# Altium PCB JlinkV9mini.PcbDoc
Units mm, origin at the board's own origin, x right, y up, seen from the top; angles counter-clockwise.
Board outline 43.05 x 18 mm, 2 copper layers (Top Layer, Bottom Layer); 47 components, 41 nets, 192 pads, 56 vias.
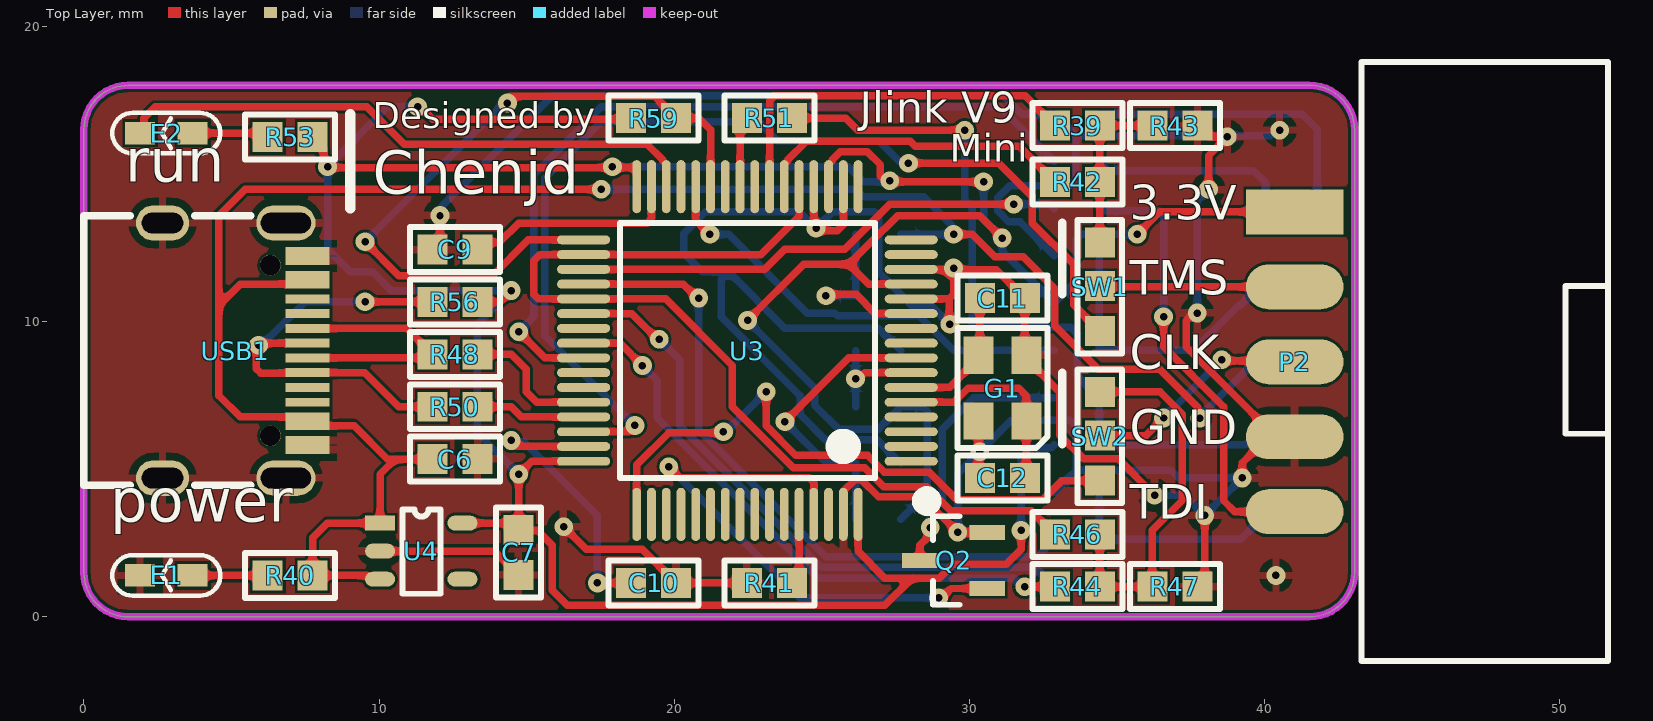
[diagram p0: Top Layer view]
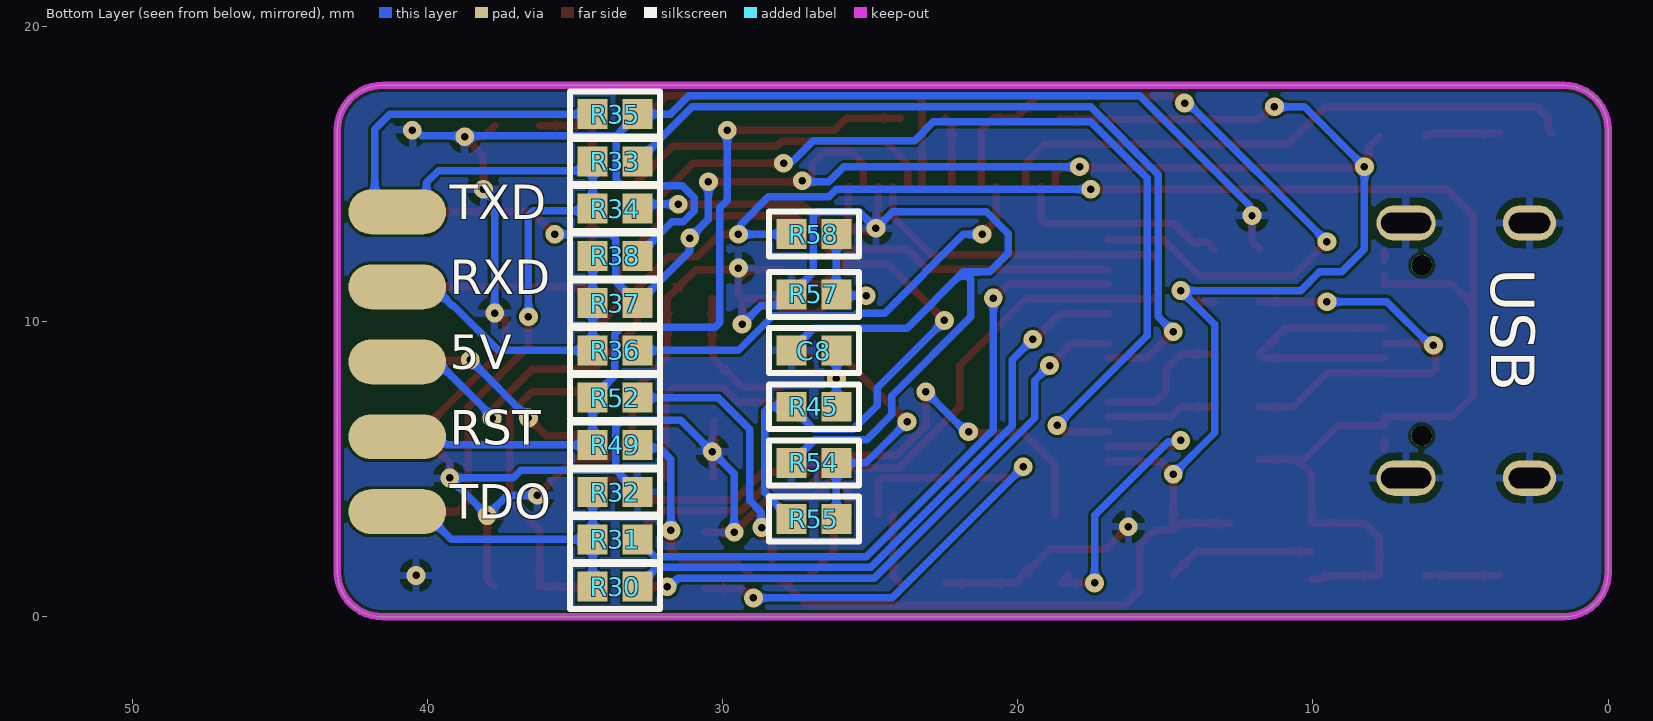
[diagram p1: Bottom Layer view, seen from below]
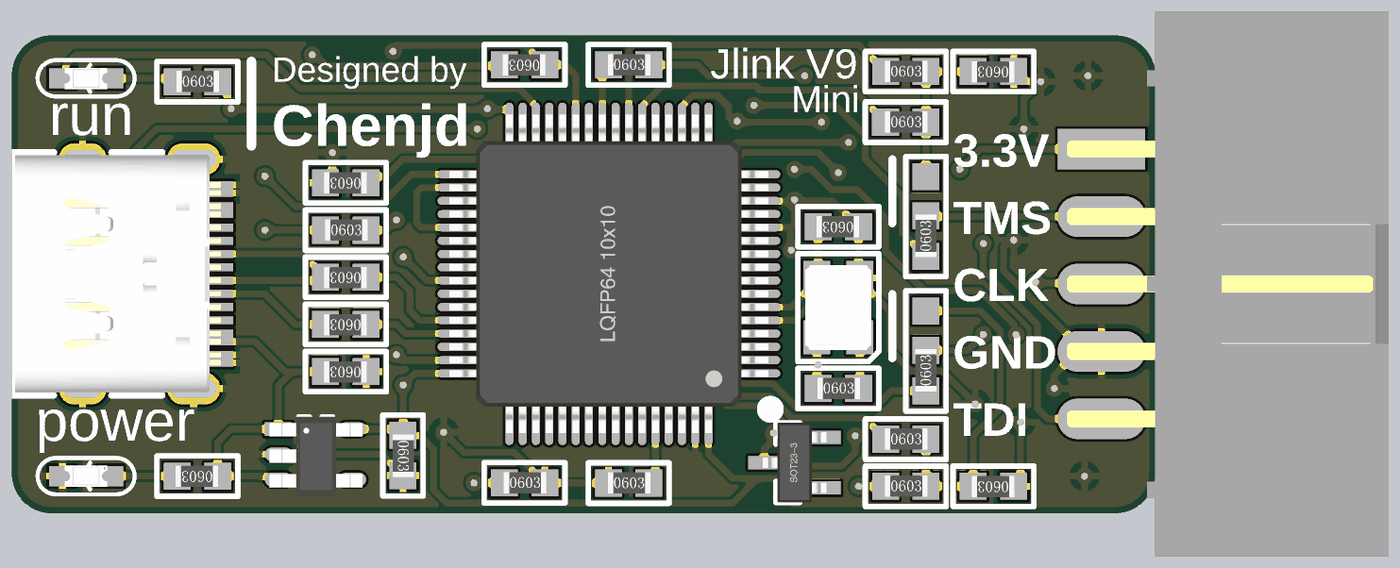
[diagram p2: 3D render of the assembled board from above, using the file's embedded part models]
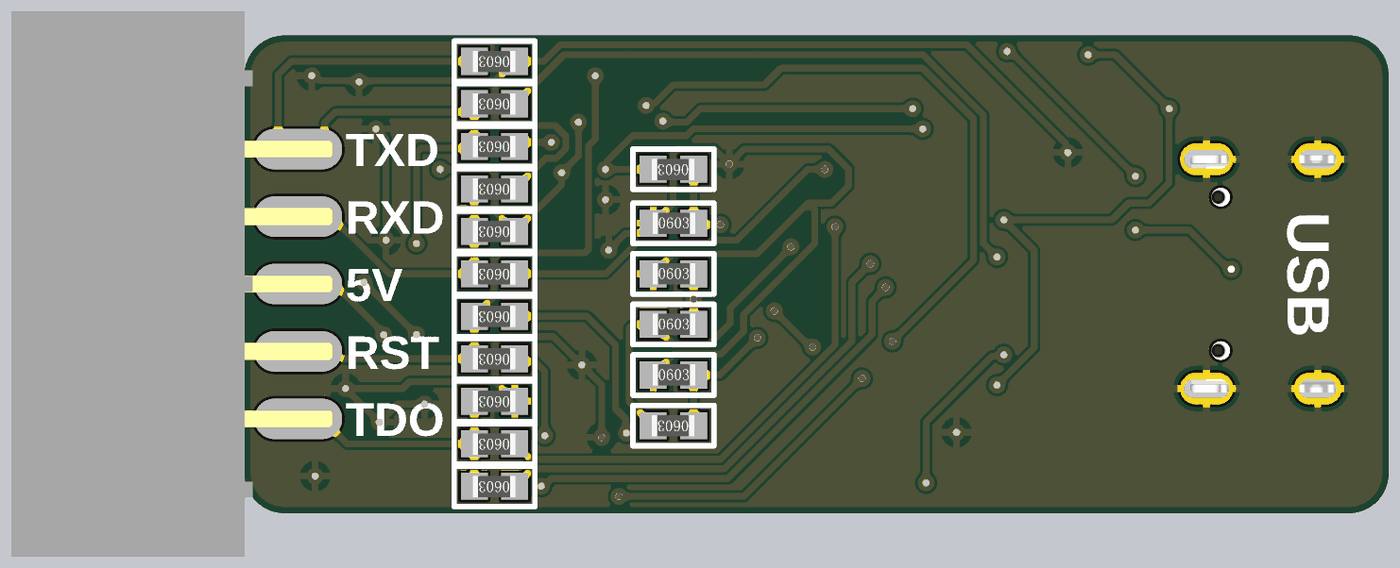
[diagram p3: 3D render of the assembled board from below, using the file's embedded part models]

## Layer stack, top to bottom
Top Solder: solder mask 0.0102, Solder Resist, Dk 3.5
Top Layer: signal copper 0.0356
Dielectric 1: dielectric 0.32, FR-4, Dk 4.8
Bottom Layer: signal copper 0.0356
Bottom Solder: solder mask 0.0102, Solder Resist, Dk 3.5

## Board outline
0,1.5 ccw(c1.5,1.5) 1.5,0 41.5,0 ccw(c41.526,1.526) 43.053,1.5 43.053,16.5 ccw(c41.527,16.474) 41.5,18 1.5,18 ccw(c1.5,16.5) 0,16.5

## Design rules (kind name [scope] priority, off if disabled: settings)
Clearance [All] p1: gap=0.1 ignorepadtopadclearanceinfootprint=FALSE
PolygonConnect [All] p1: connectstyle=Relief reliefconductorwidth=0.254 reliefentries=4 polygonreliefangle="90 Angle" airgapwidth=0.254
RoutingVias [All] p1: holewidth=0.711 width=1.27 viastyle="Through Hole" minholewidth=0.711 minwidth=1.27 maxholewidth=0.711 maxwidth=1.27
SolderMaskExpansion [All] p1: expansion=0.102 istentingtop=FALSE
Width [All] p1: maxlimit=0.254 minlimit=0.254 preferedwidth=0.254
30 further rules are at their usual default settings.

## Components (designator, comment, footprint, x,y, rotation, side; value= is the part's Value field where it differs from the comment)
C6 "10uF" 0603 13.318,5.328 r180 top
C7 "10uF" 0603 14.732,2.921 r270 top
C8 "104" 0603 27.651,9.023 r180 bottom
C9 "2.2uf" 0603 13.318,12.44 r180 top
C10 "2.2uf" 0603 18.559,1.149 r0 top
C11 "18pF" 0603 31.86,10.789 r180 top
C12 "18pF" 0603 30.37,4.705 r0 top
E1 "LED" LED_0603L 3.937,1.397 r180 top
E2 "LED" LED_0603L 3.937,16.383 r180 top
G1 "12MHz(无源贴片)" G3225 31.115,7.747 r90 top
P2 "Header 5X2" "300S-2*5P 2.54MM_2" 41.021,13.716 r0 top
Q2 "SS8050" SOT23-3N 29.464,1.905 r90 top
R30 "10K" 0603 32.893,1.01 r0 bottom
R31 "10K" 0603 32.893,2.611 r0 bottom
R32 "10K" 0603 32.893,4.212 r0 bottom
R33 "101" 0603 32.893,15.417 r0 bottom
R34 "101" 0603 32.893,13.816 r0 bottom
R35 "10K" 0603 32.893,17.018 r0 bottom
R36 "101" 0603 32.893,9.014 r0 bottom
R37 "10K" 0603 32.893,10.615 r0 bottom
R38 "10K" 0603 32.893,12.216 r0 bottom
R39 "101" 0603 32.91,16.643 r0 top
R40 "1K" 0603 7.73,1.391 r180 top
R41 "10K" 0603 22.479,1.143 r0 top
R42 "101" 0603 32.91,14.738 r0 top
R43 "10K" 0603 37.702,16.631 r180 top
R44 "101" 0603 32.91,1.022 r0 top
R45 "120" 0603 27.651,7.118 r180 bottom
R46 "101" 0603 32.91,2.794 r0 top
R47 "10K" 0603 37.702,1.01 r180 top
R48 "22R" 0603 13.318,8.884 r180 top
R49 "10K" 0603 32.893,5.812 r0 bottom
R50 "22R" 0603 13.318,7.106 r180 top
R51 "101" 0603 22.479,16.897 r0 top
R52 "101" 0603 32.893,7.413 r0 bottom
R53 "120" 0603 6.24,16.262 r0 top
R54 "10K" 0603 27.651,5.213 r180 bottom
R55 "10K" 0603 26.162,3.296 r0 bottom
R56 "1.5K" 0603 11.828,10.668 r0 top
R57 "10K" 0603 27.651,10.928 r180 bottom
R58 "10K" 0603 26.162,12.954 r0 bottom
R59 "10K" 0603 20.049,16.885 r180 top
SW1 "SW-oneoftwo" SW-oneoftwo-0603 34.411,11.176 r90 top
SW2 "SW-oneoftwo" SW-oneoftwo-0603 34.411,6.113 r90 top
U3 "STM32F205RET6" "LQFP64 10x10_N" 22.479,9.017 r90 top
U4 "SPX3819" SOT-23-5 10.033,3.17 r0 top
USB1 "KH-TYPE-C-16P" USB-C-16P 5.08,9.017 r270 top

## Footprints (in the part's own frame and the unit in brackets; to place one, negate y for a bottom-side part, rotate by r counter-clockwise, add the part's x,y. Pads: shape width x height; smd on the part's side, far side on the other; paste and mask are expansions set on the pad)
"300S-2*5P 2.54MM_2" [mil] "2.54mm 2*5P 直 简牛"
  rect 130x60 smd: 1(0,0)
  oval 130x60 smd far side: 2(0,0) 4(0,-100) 6(0,-200) 8(0,-300) 10(0,-400)
  oval 130x60 smd: 3(0,-100) 5(0,-200) 7(0,-300) 9(0,-400)
  silkscreen extent 89,-599 418,200, body extent -50,-604 426,204, height 169
0603 [mil] "0603封装"
  rect 40x40 smd: 1(-0.68,-0.23) 2(59.32,-0.23)
  silkscreen extent -31,-30 89,30, body extent -1,-16 62,16, height 18
G3225 [mil] "3225贴片晶振"
  rect 50x40 smd: 1(-44,-32) 2(44,-32) 3(44,32) 4(-44,32)
  silkscreen extent -80,-60 80,60, body extent -63,-49 63,49, height 32
LED_0603L [mil] "LED"
  rect 40x30 smd: 1(10,0) 2(80,0)
  silkscreen extent -27,-27 117,27, body extent 14,-16 77,16, height 24
"LQFP64 10x10_N" [mm] "64脚，体宽10x10mm，脚距0.5mm"
  oval 0.3x1.8 smd: 1(-3.75,-5.55) 2(-3.25,-5.55) 3(-2.75,-5.55) 4(-2.25,-5.55) 5(-1.75,-5.55) 6(-1.25,-5.55) 7(-0.75,-5.55) 8(-0.25,-5.55) 9(0.25,-5.55) 10(0.75,-5.55) 11(1.25,-5.55) 12(1.75,-5.55) 13(2.25,-5.55) 14(2.75,-5.55) 15(3.25,-5.55) 16(3.75,-5.55) 33(3.75,5.55) 34(3.25,5.55) 35(2.75,5.55) 36(2.25,5.55) 37(1.75,5.55) 38(1.25,5.55) 39(0.75,5.55) 40(0.25,5.55) 41(-0.25,5.55) 42(-0.75,5.55) 43(-1.25,5.55) 44(-1.75,5.55) 45(-2.25,5.55) 46(-2.75,5.55) 47(-3.25,5.55) 48(-3.75,5.55)
  oval 1.8x0.3 smd: 17(5.55,-3.75) 18(5.55,-3.25) 19(5.55,-2.75) 20(5.55,-2.25) 21(5.55,-1.75) 22(5.55,-1.25) 23(5.55,-0.75) 24(5.55,-0.25) 25(5.55,0.25) 26(5.55,0.75) 27(5.55,1.25) 28(5.55,1.75) 29(5.55,2.25) 30(5.55,2.75) 31(5.55,3.25) 32(5.55,3.75) 49(-5.55,3.75) 50(-5.55,3.25) 51(-5.55,2.75) 52(-5.55,2.25) 53(-5.55,1.75) 54(-5.55,1.25) 55(-5.55,0.75) 56(-5.55,0.25) 57(-5.55,-0.25) 58(-5.55,-0.75) 59(-5.55,-1.25) 60(-5.55,-1.75) 61(-5.55,-2.25) 62(-5.55,-2.75) 63(-5.55,-3.25) 64(-5.55,-3.75)
  silkscreen extent -5.35,-6.33 4.32,4.32, body extent -6,-6 6,6, height 1.45
SOT23-3N [mm] "3x1.3x1mm(长宽高)"
  rect 0.5x1.2 smd: 1(-0.95,-1.143) 2(0.95,-1.143) 3(0,1.143)
  silkscreen extent -1.5,-0.2 1.5,0.7, body extent -1.5,-1.2 1.5,1.2, height 1.05
SOT-23-5 [mil] "SPX3819"
  rect 40x20 smd: 1(0,0)
  oval 40x20 smd: 2(0,-37.4) 3(0,-74.8) 4(110,-74.8) 5(110,0)
  silkscreen extent 30,-94 81,18, body extent -13,-100 125,18, height 43
SW-oneoftwo-0603 [mil] "二选一电阻开关0603"
  rect 40x40 smd: 1(0.81,-0.24) 2(59.32,-0.23) 3(-59.19,-0.24)
  silkscreen extent -89,-30 89,30, body extent -60,-16 3,16, height 18
USB-C-16P [mm] "USB Type-c 16P"
  oval 1.2x2 hole 0.7 slot 1.7 at 90 deg: 1(-4.32,1.765) 2(4.32,1.765)
  oval 1.2x1.8 hole 0.7 slot 1.4 at 90 deg: 3(-4.32,-2.415) 4(4.32,-2.415)
  rect 0.3x1.5 smd: A1(-3.35,2.5) A4(-2.55,2.5) A5(-1.25,2.5) A6(-0.25,2.5) A7(0.25,2.5) A8(1.25,2.5) A9(2.55,2.5) A12(3.35,2.5) B1(3.05,2.5) B4(2.25,2.5) B5(1.75,2.5) B6(0.75,2.5) B7(-0.75,2.5) B8(-1.75,2.5) B9(-2.25,2.5) B12(-3.05,2.5)
  round 0.7 hole 0.7 unplated: ""(-2.89,1.235) ""(2.89,1.235)
  silkscreen extent -4.57,-5.08 4.57,0.57, body extent -4.48,-4.96 4.48,2.79, height 3.26

## Part data
C6 C7 C8 C9 C10: library part "CAP Nonpolarity", "无极电容"
C11 C12: library part CAP, "无极电容"
E1 E2: "LED灯"
G1: library part MM-11B, "无源晶振MCU使用"
P2: "Header, 5-Pin, Dual row", LatestRevisionDate=17-Jul-2002, LatestRevisionNote="Re-released for DXP Platform.", Publisher="Altium Limited"
Q2: library part 8050-SMD, "高频放大-NPN型", BOM名称=高频放大-NPN型, 学习资源=www.ooocke.com, 属性="40V 1.5A 1W 100MHZ", 版权归属=源创客
R30 R31 R32 R33 R34 R35 R36 R37 R38 R39 R40 R41 R42 R43 R44 R45 R46 R47 R48 R49 R50 R51 R52 R53 R54 R55 R56 R57 R58 R59: library part R, "电阻"
SW1 SW2: "二选一电阻开关"
U3: "Microcontroller   ST", Brand=ST, Code=104261, InitialReleaseDate=25-Mar-2015, LatestRevisionDate=25-Mar-2015, PackageReference=SQFP10x10-64, Vision=V5.0
U4: "稳压器"
USB1: library part "USB-TYPE-C 16P", BOM_Manufacturer="Shenzhen Kinghelm Elec", BOM_Manufacturer Part=KH-TYPE-C-16P, BOM_Supplier=LCSC, BOM_Supplier Part=C709357, Contributor=LCSC, spicePre=U, spiceSymbolName=KH-TYPE-C-16P

## Via types
v1: diameter 0.635, hole 0.254, Top Layer to Bottom Layer, tented both sides, 56 vias

## Nets (pads, with @x,y where several pads share a name; then routed paths per layer and width w, separated by ;. In a path a pad name is that pad's centre, name@x,y a point inside that pad or via, vN(x,y) a via of type N, cw(c..) or ccw(c..) an arc to the next point about the centre after c; other vN are vias at no path point)
3V3: C7.1 P2.1 R37.1 R45.1 R49.1 R53.2 R55.2 R56.2 R59.2 U3.13 U3.19 U3.32 U3.48 U3.64 U4.5 | length 132.7
  Top Layer w0.254: R53.2 8.128,15.875 8.128,15.47 8.255,15.343 v1(8.255,15.24) 8.28,15.215 17.907,15.215 18.708,15.215 18.729,15.194 U3.32 ; v1(11.303,17.272) 11.406,17.272 11.824,16.855 18.506,16.855 R59.2 ; U4.5 14.494,3.17 C7.1 ; R56.2 14.091,10.662 v1(14.478,11.049) ; U3.48 15.173,5.267 v1(14.732,4.826) 14.732,2.944 C7.1 ; v1(22.483,10.037) 24.384,11.938 25.917,11.938 ; U3.19 25.229,15.329 25.352,15.452 25.352,15.473 25.627,15.748 26.543,15.748 26.987,15.303 26.987,14.922 27.142,14.768 v1(27.305,14.768) ; U3.64 26.229,2.219 27.139,1.309 28.057,1.309 ; v1@27.305,14.732 v1(30.48,14.732) ; U3.13 26.588,11.267 25.917,11.938 ; v1(31.115,12.827) 30.353,13.589 27.568,13.589 26.642,12.664 25.917,11.938 ; v1(31.75,2.921) 31.75,2.286 31.242,1.778 29.445,1.778 28.975,1.309 28.057,1.309 ; v1(35.687,12.954) 36.449,13.716 P2.1 ; C7.1 14.743,2.921 15.367,2.921 15.875,2.413 15.875,0.889 16.383,0.381 27.129,0.381 28.057,1.309
  Bottom Layer w0.254: v1(11.303,17.272) 10.287,17.272 v1(8.255,15.24) 8.255,12.446 9.017,11.684 9.779,11.684 10.414,11.049 v1(14.478,11.049) 13.335,9.906 13.335,6.223 v1(14.732,4.826) ; v1(17.907,15.24) 25.889,15.24 26.397,14.732 27.269,14.732 v1(27.305,14.768) ; v1(22.483,10.037) 22.483,10.029 24.765,7.747 24.765,7.155 25.57,6.35 26.907,6.35 R45.1 28.426,7.112 28.575,6.963 28.575,4.208 R55.2 ; v1(30.48,14.732) 30.48,13.462 v1(31.115,12.827) 31.115,12.381 R37.1 33.616,11.361 33.616,12.788 33.785,12.957 35.684,12.957 v1(35.687,12.954) ; v1(31.75,2.921) 31.75,5.334 32.131,5.715 32.772,5.715 R49.1
+5: C6.2 P2.6 R40.1 R58.2 U4.1 U4.3 USB1.A4 USB1.A9 USB1.B4 USB1.B9 | length 70.2
  Top Layer w0.254: USB1.A4 USB1.B9 5.298,11.267 4.572,10.541 ; U4.3 9.71,1.27 9.583,1.397 R40.1 7.747,2.667 8.25,3.17 U4.1 10.033,4.826 10.541,5.334 ; C6.2 10.541,5.334 ; v1(17.526,14.478) 5.461,14.478 4.572,13.589 4.572,10.541 ; v1(29.464,12.954) 30.099,12.954 30.861,12.192 31.817,12.192 32.893,11.116 32.893,9.86 34.371,8.382 36.449,8.382 37.737,7.094 37.737,6.797 v1(37.81,6.724) ; 4.572,10.541 4.572,7.493 5.298,6.767 USB1.B4 USB1.A9 9.154,6.467 10.287,5.334 10.541,5.334
  Bottom Layer w0.254: v1(17.526,14.478) 26.151,14.478 26.405,14.224 28.448,14.224 29.391,13.281 29.391,13.027 v1(29.464,12.954) R58.2@27.675,12.954 ; v1(37.81,6.724) 37.81,6.781 39.665,8.636 P2.6
CLK: SW2.3 U3.49 | length 20.8
  Top Layer w0.254: U3.49 18.729,5.14 19.812,6.223 21.626,6.223 v1(21.668,6.265) ; v1(23.114,7.62) 23.114,6.469 24.122,5.461 26.552,5.461 27.123,4.89 28.638,4.89 29.564,3.964 32.479,3.964 33.125,4.61 SW2.3
  Bottom Layer w0.254: v1(21.668,6.265) 21.759,6.265 v1(23.114,7.62)
D+: R50.1 U3.45 | length 3.7
  Top Layer w0.254: R50.1 14.478,7.112 14.823,6.767 U3.45
D-: R48.1 U3.44 | length 4.7
  Top Layer w0.254: R48.1 14.478,8.89 14.986,8.382 14.986,7.62 15.339,7.267 U3.44
DIO: SW1.3 U3.46 | length 35.3
  Top Layer w0.254: U3.46 18.459,6.267 v1(18.669,6.477) ; v1(27.936,15.363) 27.94,15.367 30.988,15.367 32.131,14.224 32.131,13.335 33.528,11.938 33.528,10.562 SW1.3
  Bottom Layer w0.254: v1(18.669,6.477) 15.621,9.525 15.621,14.859 17.526,16.764 22.86,16.764 23.495,16.129 26.924,16.129 27.617,15.436 27.863,15.436 v1(27.936,15.363)
GND: C6.1 C7.2 C8.1 C9.2 C10.2 C11.1 C12.1 E1.2 G1.2 G1.4 P2.7 Q2.2 R32.1 R35.1 R38.1 R41.1 R43.1 R47.1 R54.1 R57.1 U3.12 U3.14 U3.18 U3.20 U3.63 U4.2 USB1.1 USB1.2 USB1.3 USB1.4 USB1.A1 USB1.A12 USB1.B1 USB1.B12 | length 150.6
  Top Layer w0.254: USB1.A12 USB1.B1 ; USB1.B12 USB1.A1 ; U4.2 13.92,2.22 C7.2 ; C9.2 12.065,12.7 v1(12.065,13.589) ; v1(16.256,3.048) 17.018,2.286 18.923,2.286 C10.2 22.456,1.143 R41.1 ; U3.20 24.729,13.23 24.878,13.081 25.527,13.081 25.781,13.335 25.738,13.378 25.738,14.558 U3.18 ; U3.63 25.738,3.476 25.738,4.259 26.124,4.645 26.334,4.645 26.924,4.055 28.409,4.055 v1(29.608,2.856) 29.609,2.855 Q2.2 ; U3.12 29.309,10.767 ; U3.14 28.038,11.758 29.136,11.758 ; v1@29.337,9.906 v1(29.341,9.91) 29.309,9.942 29.309,10.767 ; G1.4 30.302,4.75 C12.1 ; v1(36.271,4.114) 35.04,5.345 33.869,5.345 33.062,6.152 33.062,7.603 31.928,8.738 G1.2 31.877,8.915 C11.1 30.914,11.758 29.136,11.758 ; R47.1 37.973,1.27 v1(37.973,3.429) ; v1@37.719,10.414 37.338,10.033 37.338,9.144 P2.7@40.386,6.096 ; R43.1 38.1,16.256 v1(38.735,16.256) 38.1,15.621 v1(38.1,14.478) ; v1(39.243,4.699) 39.243,5.207 40.132,6.096 P2.7@40.386,6.096 ; P2.7 P2.7@40.386,6.096 ; 29.136,11.758 29.464,11.43 29.464,10.922 29.309,10.767
  Bottom Layer w0.254: v1(12.065,13.589) 12.138,13.662 12.138,13.916 15.868,17.646 31.153,17.646 31.775,17.024 R35.1 33.611,16.289 ; R54.1 26.88,5.996 25.119,5.996 24.261,6.854 24.261,7.489 21.59,10.16 21.59,11.43 21.844,11.684 ; C8.1 26.907,9.779 23.749,9.779 21.844,11.684 ; v1(29.341,9.91) 29.333,9.91 28.702,10.541 28.05,10.541 R57.1 26.924,11.667 26.924,13.567 26.775,13.716 25.364,13.716 v1(24.803,13.155) 24.243,13.716 21.06,13.716 20.32,12.976 20.32,12.319 20.955,11.684 21.844,11.684 ; v1(29.608,2.856) 29.608,4.843 v1(30.353,5.588) 31.42,6.655 33.412,6.655 33.611,6.455 33.611,4.953 ; R32.1 33.611,4.953 ; R38.1 31.726,13.371 31.333,13.371 30.956,13.748 30.956,14.2 31.361,14.605 33.395,14.605 33.611,14.821 33.611,16.289 ; v1(36.271,4.114) 37.288,4.114 v1(37.973,3.429) v1(39.243,4.699) 37.096,4.699 36.842,4.953 33.611,4.953 ; v1(37.719,10.287) 37.719,14.097 v1(38.1,14.478) ; v1(40.513,16.479) 40.379,16.479 40.189,16.289 38.735,16.289 33.611,16.289
  other v1: 40.386,1.397 29.464,11.811
LED: E2.2 U3.30 | length 20
  Top Layer w0.254: E2.2 2.032,16.51 2.032,16.891 2.413,17.272 9.588,17.272 10.858,16.002 19.077,16.002 19.606,15.473 19.606,15.452 19.729,15.329 U3.30
NetC8_2: C8.2 R45.2 U3.7 | length 3.9
  Top Layer w0.254: v1(26.145,8.064) 26.248,8.064 26.45,8.267 U3.7
  Bottom Layer w0.254: R45.2 v1(26.145,8.064) C8.2
NetC9_1: C9.1 U3.31 | length 7.4
  Top Layer w0.254: C9.1 13.567,12.678 14.075,12.678 14.732,13.335 19.08,13.335 19.229,13.484 U3.31
NetC10_1: C10.1 U3.47 | length 10.3
  Top Layer w0.254: v1(14.478,5.969) 14.68,5.767 U3.47 U3.47@16.938,5.758 ; v1(17.399,1.143) C10.1 C10.1@18.288,1.397
  Bottom Layer w0.254: v1(14.478,5.969) 14.527,5.92 14.908,5.92 17.399,3.429 v1(17.399,1.143)
NetE1_1: E1.1 R40.2 | length 2.5
  Top Layer w0.254: E1.1 R40.2
NetE2_1: E2.1 R53.1 | length 2.6
  Top Layer w0.254: E2.1 6.096,16.383 R53.1
NetP2_3: P2.3 SW1.1 | length 6.6
  Top Layer w0.254: SW1.1 34.438,11.176 P2.3
NetP2_5: P2.5 SW2.1 | length 7.7
  Top Layer w0.254: SW2.1 35.979,6.134 v1(36.576,6.731) ; v1(38.549,8.704) 38.582,8.67 40.987,8.67 P2.5
  Bottom Layer w0.254: v1(36.576,6.731) v1(38.549,8.704)
NetQ2_3: Q2.3 R52.1 | length 9
  Top Layer w0.254: Q2.3 28.321,2.413 28.696,2.788 28.696,2.998 v1(28.674,3.02)
  Bottom Layer w0.254: v1(28.674,3.02) 28.702,3.048 28.702,3.556 29.083,3.937 29.083,6.35 30.152,7.419 R52.1
NetR41_2: R41.2 U3.60 | length 2.4
  Top Layer w0.254: R41.2 24.229,1.38 U3.60
OSCIN: C12.2 G1.1 U3.5 | length 7
  Top Layer w0.254: U3.5 29.476,7.267 29.956,7.747 31.671,7.747 31.928,7.489 G1.1 ; C12.2 31.928,4.75 G1.1
OSCOUT: C11.2 G1.3 U3.6 | length 4.8
  Top Layer w0.254: U3.6 29.332,7.767 30.302,8.738 G1.3 30.353,8.915 C11.2
PA5: R46.1 U3.21 U3.34 U3.37 | length 33.6
  Top Layer w0.254: U3.21 24.229,13.561 22.935,12.267 U3.34 15.442,12.267 15.24,12.065 15.24,10.922 15.395,10.767 U3.37 19.713,10.767 21.971,8.509 21.971,7.111 24.029,5.053 26.459,5.053 27.103,4.409 28.556,4.409 29.373,3.592 32.089,3.592 R46.1
PA6: R42.1 U3.22 | length 10.8
  Top Layer w0.254: U3.22 23.729,15.329 23.852,15.452 23.852,15.473 24.481,16.102 28.002,16.102 28.169,15.935 31.69,15.935 R42.1
PA7: R39.1 U3.23 | length 13.1
  Top Layer w0.254: U3.23 23.229,17.471 23.404,17.646 31.884,17.646 R39.1
PA8: R33.1 U3.41 | length 27.5
  Top Layer w0.254: v1(14.732,9.652) 15.617,8.767 U3.41
  Bottom Layer w0.254: v1(14.732,9.652) 15.24,10.16 15.24,14.979 17.533,17.272 31.027,17.272 R33.1
PB1: R59.1 U3.27 U3.33 | length 24.6
  Top Layer w0.254: v1(9.525,12.7) 10.668,11.557 13.843,11.557 15.053,12.767 U3.33 ; v1(14.351,17.399) 14.351,17.526 14.451,17.626 19.331,17.626 R59.1 20.828,16.891 21.229,16.49 U3.27
  Bottom Layer w0.254: v1(9.525,12.7) 14.224,17.399 v1(14.351,17.399)
PB2: R36.1 U3.28 | length 15.1
  Top Layer w0.254: U3.28 20.729,13.434 v1(21.209,12.954)
  Bottom Layer w0.254: v1(21.209,12.954) 21.844,12.954 24.511,10.287 25.443,10.287 25.543,10.187 28.294,10.187 29.461,9.02 R36.1
PB8: Q2.1 U3.61 | length 19
  Top Layer w0.254: v1(19.812,5.08) 20.193,4.699 24.58,4.699 24.729,4.55 U3.61 ; v1(28.956,0.635) 29.059,0.635 29.379,0.955 Q2.1
  Bottom Layer w0.254: v1(19.812,5.08) 24.257,0.635 v1(28.956,0.635)
PB14: R34.1 U3.35 | length 16.9
  Top Layer w0.254: U3.35 23.07,11.767 23.749,12.446 25.781,12.446 27.305,13.97 31.496,13.97 v1(31.5,13.974)
  Bottom Layer w0.254: v1(31.5,13.974) 32.724,13.974 R34.1
PB15: R31.1 U3.36 | length 22.6
  Top Layer w0.254: U3.36 20.312,11.267 20.784,10.795 v1(20.828,10.795)
  Bottom Layer w0.254: v1(20.828,10.795) 20.828,6.335 25.131,2.032 32.291,2.032 R31.1
PC0: R54.2 R55.1 U3.8 | length 10.1
  Top Layer w0.254: v1(23.749,6.604) 25.912,8.767 U3.8
  Bottom Layer w0.254: v1(23.749,6.604) 25.146,5.207 R54.2 R55.1
PC3: R57.2 R58.1 U3.11 | length 6.2
  Top Layer w0.254: v1@25.146,10.922 26.162,10.922 26.817,10.267 U3.11
  Bottom Layer w0.254: v1(25.139,10.872) 26.095,10.872 R57.2 R58.1
PC5: R51.1 U3.25 | length 2.4
  Top Layer w0.254: U3.25 22.229,16.658 R51.1
PC7: R30.1 U3.38 | length 21.1
  Top Layer w0.254: U3.38 18.562,10.267 19.431,9.398 v1(19.494,9.398)
  Bottom Layer w0.254: v1(19.494,9.398) 20.193,8.699 20.193,6.47 24.985,1.678 32.214,1.678 R30.1
PC9: R44.1 U3.40 | length 20.1
  Top Layer w0.254: U3.40 18.165,9.267 v1(18.923,8.509) ; v1(31.877,1.016) R44.1
  Bottom Layer w0.254: v1(18.923,8.509) 19.431,8.001 19.431,6.731 24.856,1.306 31.501,1.306 31.792,1.016 v1(31.877,1.016)
RST: P2.8 R49.2 R51.2 R52.2 | length 27.2
  Top Layer w0.254: R51.2 25.805,16.891 26.216,16.479 v1(29.845,16.479)
  Bottom Layer w0.254: v1(29.845,16.479) 29.845,14.104 30.099,13.85 30.099,9.952 30.248,9.803 33.43,9.803 33.659,9.573 33.659,8.159 R52.2 R49.2 39.348,5.818 39.383,5.853 40.778,5.853 P2.8
RXD: P2.4 R36.2 R37.2 R38.2 | length 10.7
  Bottom Layer w0.254: R38.2 R37.2 R36.2 37.595,9.02 39.116,10.541 39.153,10.541 39.788,11.176 P2.4
TCK: R44.2 R46.2 R47.2 SW2.2 | length 12.9
  Top Layer w0.254: R46.2 R44.2 R47.2 36.195,2.921 37.211,3.937 37.211,6.866 36.457,7.62 SW2.2
TDI-Y: P2.2 P2.9 R33.2 R34.2 R35.2 | length 35.3
  Top Layer w0.254: v1(36.576,10.16) 36.576,9.144 38.608,7.112 38.608,3.937 38.989,3.556 P2.9
  Bottom Layer w0.254: R34.2 34.466,13.755 36.41,13.755 36.576,13.589 v1(36.576,10.16) ; R34.2 R33.2 34.71,15.113 39.624,15.113 40.027,14.71 40.027,14.303 40.613,13.716 P2.2 41.196,13.716 41.783,14.303 41.783,16.51 41.269,17.024 R35.2
TDO: P2.10 R30.2 R31.2 R32.2 | length 10.5
  Bottom Layer w0.254: R30.2 R31.2 ; R32.2 R31.2 ; P2.10@39.878,3.556 P2.10@40.132,3.556 ; P2.10 P2.10@40.132,3.556 ; R31.2 39.193,2.617 P2.10@40.132,3.556
TMS: R39.2 R42.2 R43.2 SW1.2 | length 5.7
  Top Layer w0.254: SW1.2 R42.2 R39.2 R43.2
USB_N: R48.2 USB1.A7 USB1.B7 | length 8.9
  Top Layer w0.254: USB1.A7 11.688,8.767 R48.2 10.934,9.767 USB1.B7
USB_P: R50.2 R56.1 USB1.A6 USB1.B6 | length 15.5
  Top Layer w0.254: USB1.A6 5.991,9.267 v1(5.916,9.193) 5.842,9.118 5.842,8.404 5.991,8.255 7.568,8.255 USB1.B6 9.513,8.267 10.668,7.112 R50.2 ; v1(9.525,10.668) 11.805,10.668 R56.1
  Bottom Layer w0.254: v1(5.916,9.193) 6.018,9.193 7.493,10.668 v1(9.525,10.668)
pads on no net: U3.1 U3.2 U3.3 U3.4 U3.9 U3.10 U3.15 U3.16 U3.17 U3.24 U3.26 U3.29 U3.39 U3.42 U3.43 U3.50 U3.51 U3.52 U3.53 U3.54 U3.55 U3.56 U3.57 U3.58 U3.59 U3.62 U4.4 USB1. USB1.A5 USB1.A8 USB1.B5 USB1.B8

## Polygon pours and split planes (outlines as drawn)
GND on Top Layer "GND_L01_P000" (solid, remove dead copper, pour order 0): 0,0 43.053,0 43.053,18.034 43.019,18 0.034,18 0,18.034
GND on Bottom Layer "GND_L02_P001" (solid, remove dead copper, pour order 1): 0,0 42.926,0 43.053,0.127 43.053,18.034 43.019,18 0.034,18 0,18.034

## Keep-outs
Keep-Out Layer:
  the board outline again, w0.254

## Silkscreen, mask and mechanical layers (free items; w line width, h text height)
Top Overlay:
  lines w0.3: 33.147,5.842 33.147,8.255 ; 33.147,10.922 33.147,13.335
  lines w0.354: 9.017,13.843 9.017,17.018
  text "Jlink V9" at 26.289,16.383 h1.8
  text "Designed by" at 9.779,16.256 h1.5
  text "Mini" at 29.337,15.113 h1.6
  text "run" at 1.397,14.249 h2.5
  text "Chenjd" at 9.779,13.843 h2.5
  text "3.3V" at 35.433,13.057 h2
  text "TMS" at 35.433,10.523 h2
  text "CLK" at 35.433,7.989 h2
  text "GND" at 35.433,5.455 h2
  text "TDI" at 35.433,2.921 h2
  text "power" at 0.889,2.73 h2.5
Bottom Overlay:
  text "TXD" at 39.243,13.081 h2
  text "USB" at 4.445,11.811 h2.54 r90
  text "RXD" at 39.243,10.535 h2
  text "5V" at 39.243,7.989 h2
  text "RST" at 39.243,5.443 h2
  text "TDO" at 39.243,2.921 h2